# EAGLE board avip no micro (EAGLE 7.2.0)
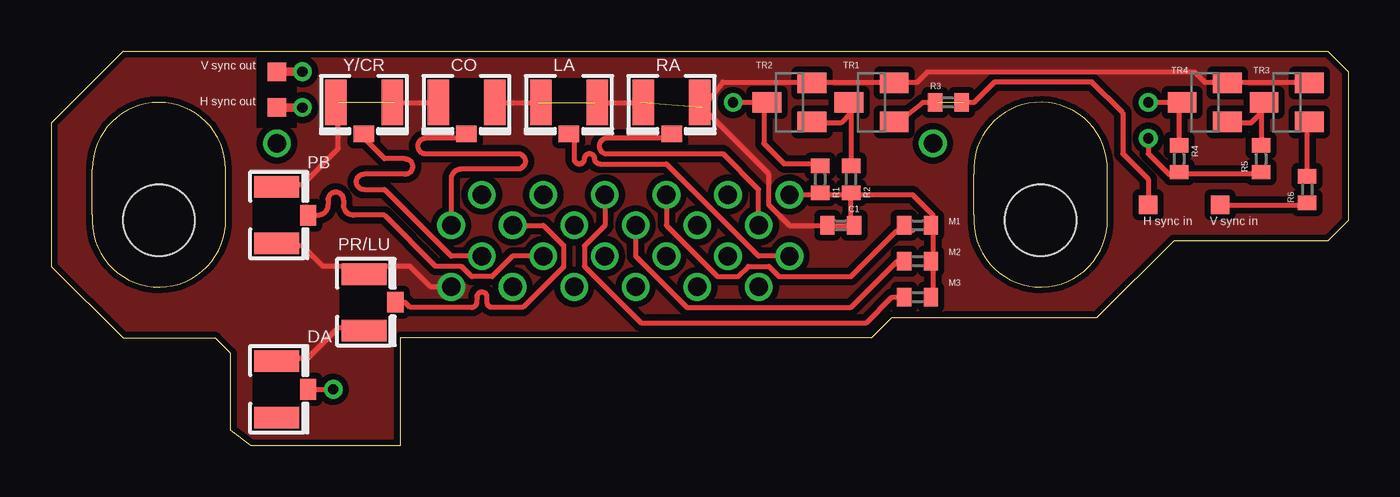
[diagram p0: board, top side]
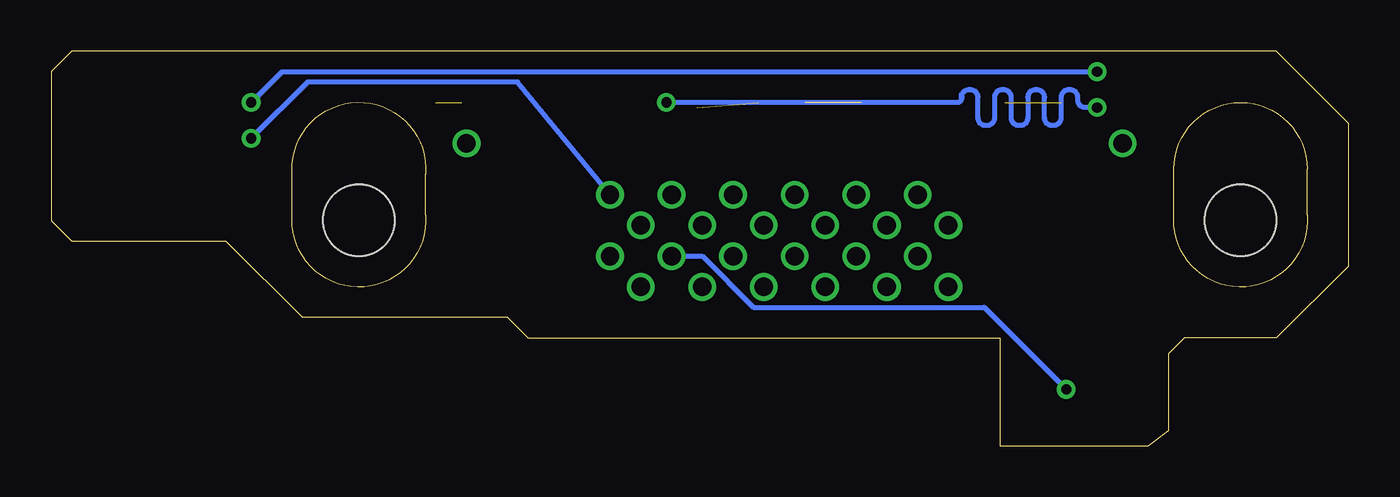
[diagram p1: board, bottom side, seen from below]

Size 63.25 x 19.25 mm. Coordinates in mm from the lower left corner, seen from the top.
Outline: 40,5.25 41,6.25 51,6.25 54.75,10 62.25,10 63.25,11 63.25,18.25 62.25,19.25 3.5,19.25 0,15.75 0,8.75 3.5,5.25 8,5.25 8.75,4.5 8.75,0.75 9.75,0 17,0 17,5.25 40,5.25
Outline: 8.5,13.5 arc180 2,13.5 2,11.25 arc180 8.5,10.75 8.5,13.5
Outline: 51.5,13.75 arc180 45,13.25 45,11.25 arc180 51.5,10.75 51.5,13.75
Copper layers (1*16): Top 0.035mm / dielectric 1.5mm / Bottom 0.035mm
Design rules "default *": minimum track width 10mil, minimum drill 24mil, track to track 8mil, track to pad 8mil, pad to pad 8mil, via to via 8mil, smd to smd 8mil, copper to edge 8mil, drill to drill 8mil, minimum pad ring 10mil, minimum via ring 8mil, stop-mask expansion 4mil, vias tented up to drill 0mil, thermal gap 10mil
Net classes: 0 standard: width 0.25 mm; 1 video length: width 0.006 mm
Holes 3.5 mm at 5.25,11 48.25,11
tRestrict: area 2.2,8 to 8.2,16.5; area 45.2,8 to 51.2,16.5

## Footprints (pad centres in the part's own frame; a part is rotated, then mirrored left to right if it is on the bottom)
R0402 = smd 0.7 x 0.9: 1 -0.65,0; 2 0.65,0
U.FL = smd 2.2 x 1.05: 1 0,1.375; 2 0,-1.375 | smd 0.8 x 1: 3 1.525,0
TP09SQ = smd 0.9 x 0.9: TP 0,0
SOT23-BCE = smd 1 x 1.4: B -0.95,-1.1; C 0.95,-1.1; E 0,1.1

## Placement (x,y rotation side)
C1  [R0402]  38.5,10.75 180 top
CO  [U.FL]  20.25,16.75 270 top
DA  [U.FL]  11,2.75 0 top
E$7  [TP09SQ]  53.5,11.75 180 top
E$11  [TP09SQ]  11,16.5 180 top
E$14  [TP09SQ]  57,11.75 180 top
E$15  [TP09SQ]  11,18.25 180 top
L1  [R0402]  42.25,10.75 180 top
L2  [R0402]  42.25,9 0 top
L3  [R0402]  42.25,7.25 0 top
LA  [U.FL]  25.25,16.75 270 top
PB  [U.FL]  11,11.25 0 top
PR/LU  [U.FL]  15.25,7 0 top
R1  [R0402]  37.5,13 90 top
R2  [R0402]  39,13 270 top
R3  [R0402]  43.75,16.75 0 top
R4  [R0402]  55,14 270 top
R5  [R0402]  59,14 90 top
R6  [R0402]  61.25,12.5 90 top
RA  [U.FL]  30.25,16.75 270 top
TR1  [SOT23-BCE]  40,16.75 90 top
TR2  [SOT23-BCE]  36,16.75 90 top
TR3  [SOT23-BCE]  60.25,16.75 90 top
TR4  [SOT23-BCE]  56.25,16.75 90 top
Y/CR  [U.FL]  15.25,16.75 270 top

## Library data of the parts
C1 L1-L3 R1-R6 = eagle-ltspice
CO DA LA PB PR/LU RA Y/CR = adafruit
E$7 E$11 E$14 E$15 = testpad1
TR1-TR4 = ref-packages

## Nets
H_SYNC_IN: E$7.TP
H_SYNC_OUT: E$11.TP
V_SYNC_OUT: E$15.TP

## Tracks (layer width: path | path; a pad name or v marks a point on that pad's centre or on a via)
AUDIO_LEFT_OUTPUT  (via drill 0.9 pad 0.81)
  Top 0.254: v36,9.25 34.5,9.25 30,13.75 26.75,13.75 arc-90 26.5,14 arc90 26.25,14.25 arc90 26,14 arc-90 25.75,13.75 arc-90 25.5,14 25.5,15.25
AUDIO_LEFT_OUTPUT_GROUND  (via drill 0.9 pad 0.81)
  other vias: 33,12.25
AUDIO_RIGHT_OUTPUT  (via drill 0.9 pad 0.81)
  Top 0.254: v34.5,10.75 34.5,12.5 32.75,14.25 27,14.25 arc-143 27,15 30.25,15
AUDIO_RIGHT_OUTPUT_GROUND  (via drill 0.9 pad 0.25)
  other vias: 34.5,7.75
COMPONENT_PB_GROUND  (via drill 0.9 pad 0.81)
  other vias: 25.5,7.75
COMPONENT_PB_OUTPUT  (via drill 0.9 pad 0.81)
  Top 0.254: v24,9.25 22.5,9.25 21.5,8.25 20.5,8.25 20,8.75 18.75,8.75 16.25,11.25 14.75,11.25 arc-90 14.25,11.75 14.25,12 arc180 13.5,12 13.5,11.75 arc-90 13,11.25 12.75,11.25
COMPONENT_PR_GROUND  (via drill 0.9 pad 0.81)
  other vias: 24,12.25
COMPONENT_PR_OUTPUT  (via drill 0.9 pad 0.81)  (1 unrouted)
  Top 0.254: v22.5,10.75 24,10.75 25,9.75 25,8.75 23,6.75 21.5,6.75 arc-90 21.25,7 21.25,7.25 arc90 21,7.5 arc90 20.75,7.25 20.75,7 arc-91 20.5,6.75 | 20.5,6.75 17.5,6.75 17.25,7 16.75,7
COMPONENT_Y_GROUND  (via drill 0.9 pad 0.81)
  other vias: 22.5,7.75
COMPONENT_Y_OUTPUT  (via drill 0.9 pad 0.81)
  Top 0.254: v21,9.25 19.5,9.25 16.25,12.5 15.25,12.5 arc-180 15.25,13.25 17.25,13.25 arc180 17.25,14 16.25,14 15.25,15
COMPOSITE_GROUND  (via drill 0.9 pad 0.81)
  other vias: 21,12.25
COMPOSITE_OUTPUT  (via drill 0.9 pad 0.81)
  Top 0.254: 20,15 18.25,15 arc180 18.25,14.25 22.75,14.25 arc-180 22.75,13.5 20,13.5 arc90 19.5,13 v19.5,10.75
DIGITAL_AUDIO_OUTPUT  (via drill 0.5)
  Top 0.254: 12.5,2.75 v13.75,2.75
  Bottom 0.254: v13.75,2.75 17.75,6.75 29,6.75 31.5,9.25 33,9.25
GROUND  (via drill 0.9 pad 0.81)  (3 unrouted)
  Top 0.254: 61.25,17.75 56.25,17.75 55.75,18.25 42.75,18.25 42.25,17.75 32.75,17.75 31.75,16.5 35,13.25 35,11.75 36,10.75 39,10.75 | 16.75,16.75 18.5,16.75 | 22,16.75 23.75,16.75 | 26.5,16.75 28.75,16.75 | 14,16.75 14,14.5 12.25,12.75 10.75,12.75 | v19.5,7.75 18.5,7.75 17.5,8.75 13.25,8.75 12.25,9.75 10.25,9.75 | 15,5.75 14,5.75 12.5,4.25 11.25,4.25
  pour Top (isolate 0.305): 0,15.75 0,8.75 3.5,5.25 8,5.25 8.75,4.5 8.75,0.75 9.75,0 17,0 17,5.25 40,5.25 41,6.25 51,6.25 54.75,10 62.25,10 63.25,11 63.25,18.25 62.25,19.25 12,19.25 12,15.5 10,15.5 10,19.25 3.5,19.25
H_SYNC_IN  (1 unrouted)
  Top 0.254: E$7.TP 53.5,13 52.25,14.25 52.25,16.25 50.75,17.75 46,17.75 45,16.75 44.5,16.75 | 43.25,16.75 42.5,16.75
H_SYNC_OUT  (via drill 0.5 pad 0.25)
  Top 0.254: 34.5,16.75 v33.25,16.75
  Top 0.406: v12.25,16.5 E$11.TP
  Bottom 0.254: v12.25,16.5 12.81,16.5 arc90 13.19,16.88 13.19,17 arc-90 13.57,17.38 13.62,17.38 arc-90 14,17 14,16 arc90 14.38,15.62 14.43,15.62 arc90 14.81,16 14.81,17 arc-90 15.2,17.38 15.24,17.38 arc-90 15.62,17 15.62,16 arc90 16.01,15.62 16.05,15.62 arc90 16.44,16 16.44,17 arc-90 16.82,17.38 16.87,17.38 arc-90 17.25,17 17.25,16 arc90 17.63,15.62 17.68,15.62 arc90 18.06,16 18.06,17 arc-90 18.44,17.38 18.49,17.38 arc-90 18.87,17 18.87,17.13 arc90 19,16.75 v33.25,16.75
MODE_1  (via drill 0.9 pad 0.81)
  Top 0.254: v30,12.25 30,10.75 32.5,8.25 33.5,8.25 34,8.75 35,8.75 35.5,8.25 39,8.25 41.25,10.5 42,10.5
MODE_1_GROUND  (via drill 0.9 pad 0.81)
  other vias: 30,9.25
MODE_2  (via drill 0.9 pad 0.81)
  Top 0.254: v28.5,10.75 28.5,9.25 31,6.75 39,6.75 41.25,9 41.75,9
MODE_2_GROUND  (via drill 0.9 pad 0.81)
  other vias: 28.5,7.75
MODE_3  (via drill 0.9 pad 0.81)
  Top 0.254: v27,12.25 27,10.75 26,9.75 26,8.75 28.75,6 39.75,6 41,7.25 41.75,7.25
MODE_3_GROUND  (via drill 0.9 pad 0.81)
  other vias: 27,9.25
S$2  (via drill 0.9)
  other vias: 43,14.75
S$4
  Top 0.254: 41.25,15.75 42.5,16.75
S$8  (via drill 0.9)
  other vias: 11,14.75
S$9
  Top 0.254: 12.5,11.25 12.75,11
S$17  (via drill 0.9 pad 0.81)
  other vias: 31.5,10.75
S$18  (via drill 0.9 pad 0.81)
  other vias: 33,9.25
S$19  (via drill 0.9 pad 0.81)
  other vias: 25.5,10.75
S$23
  Top 0.254: 39,16.75 39,16.25 | 39,16.25 38.5,15.75 37.5,15.75 | 39,16.25 39,13.75
S$24
  Top 0.254: 34.75,16.75 34.75,14.75 35.75,13.75 37.5,13.75
S$29  (via drill 0.9 pad 0.81)
  other vias: 31.5,7.75
S$30
  Top 0.254: 61.25,13 61.25,15.75
S$31
  Top 0.254: 59,16.75 59,16.25 | 59,16.25 58.5,15.75 57,15.75 | 59,16.25 59,14.5
S$32
  Top 0.254: 55,16.75 55,15
S$36
  Top 0.254: 54.75,16.75 53.25,16.75
V_SYNC_IN
  Top 0.254: 57,11.75 61.25,11.75
V_SYNC_OUT  (via drill 0.5 pad 0.25)
  Top 0.406: v12.25,18.25 E$15.TP
  Bottom 0.254: v53.5,16.75 52,18.25 v12.25,18.25
VCC  (via drill 0.5, 0.9 pad 0.81)
  Top 0.254: v36,12.25 39,12.25 | 59,13.25 54.5,13.25 53.5,14.25 v53.5,15 | 39,10.75 39,12.25 | 39,12.25 42,12.25 43,11.25 43,7.25
  Bottom 0.254: v36,12.25 40.5,17.75 50.75,17.75 v53.5,15

## Text on the board
tNames: V sync out | H sync out | M1 | H sync in | V sync in | M2 | M3